# Altium PCB ALCT_MEZ_LX150T.PcbDoc (part 9 of 9)
Units mil, origin at the board's own origin, x right, y up, seen from the top; angles counter-clockwise.
Board outline 4101.98 x 5875.01 mil, 12 copper layers (Top Layer, Mid-Layer 1, +3V3, Mid-Layer 2, +1V2, Mid-Layer 4, +2V5, Mid-Layer 5, GND1, Mid-Layer 7, GND2, Bottom Layer), stack 64.7 mil thick; 378 components, 616 nets, 2492 pads, 1686 vias.
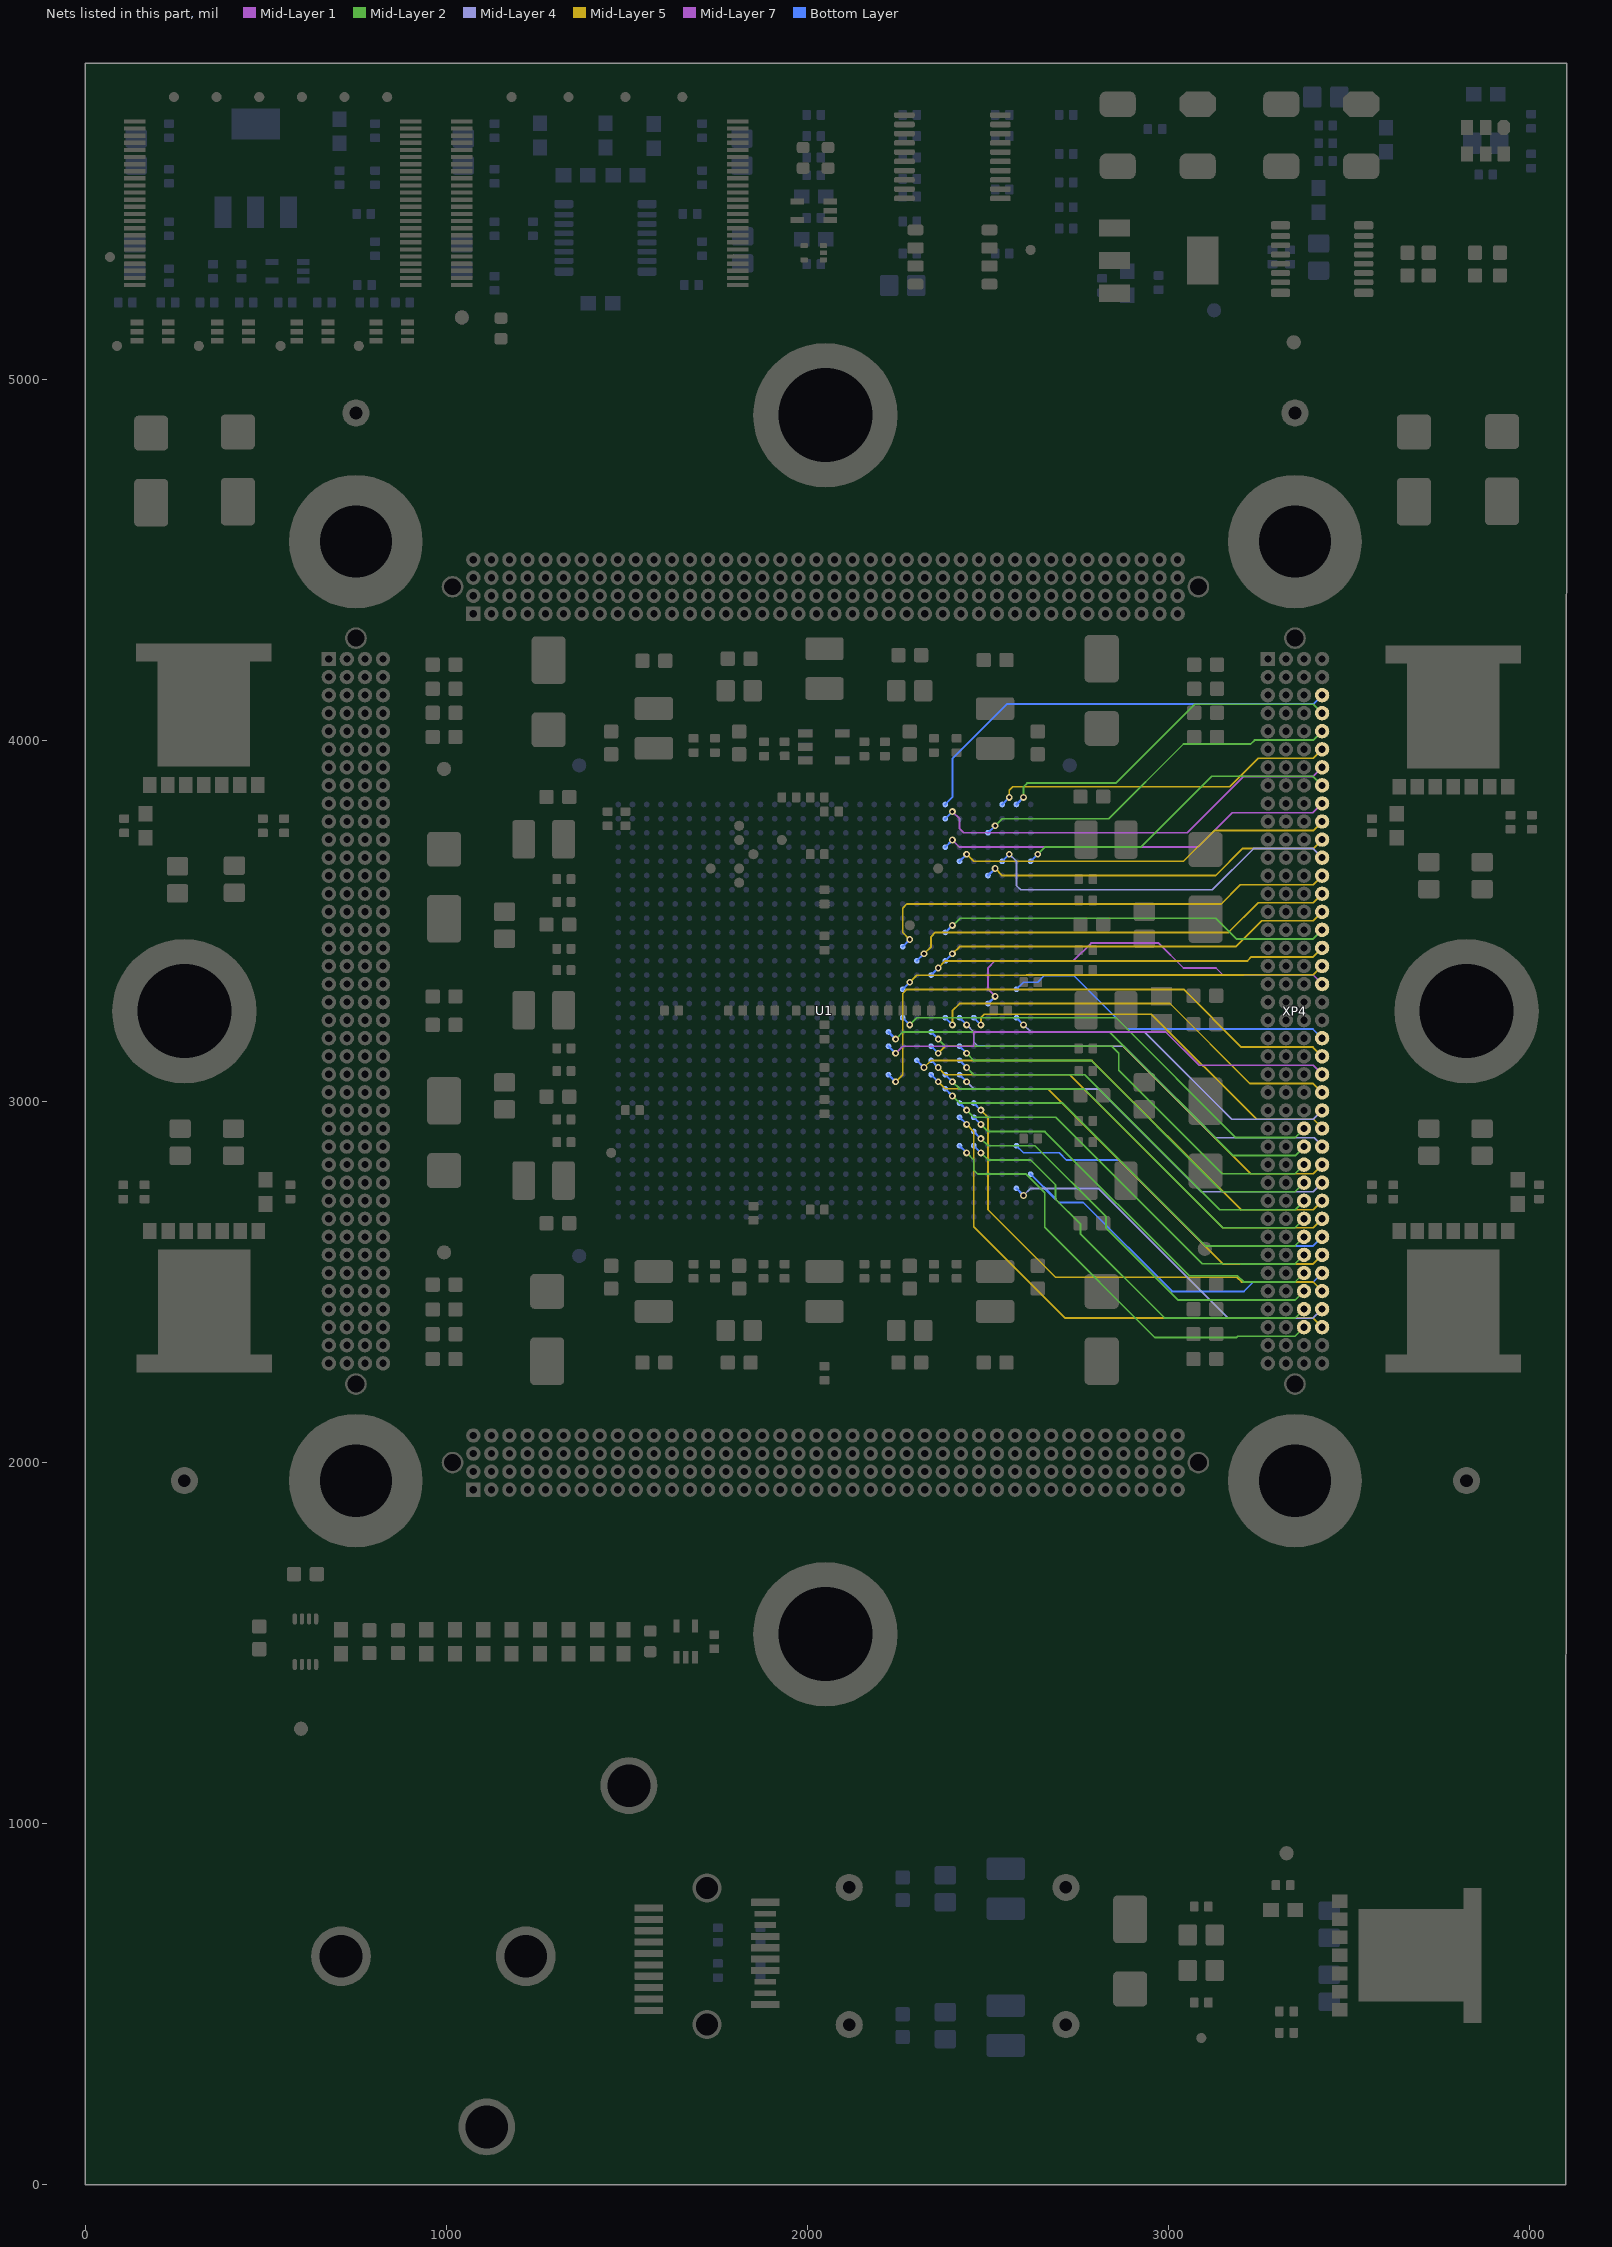
[diagram p18: the nets of this part, all layers, seen from the top]

## Via types
v1: diameter 19, hole 10, Top Layer to Bottom Layer, tented both sides, 1667 vias
v2: diameter 40, hole 20, Top Layer to Bottom Layer, 12 vias
v3: diameter 19, hole 10, Top Layer to Bottom Layer, 7 vias

## Nets (pads, with @x,y where several pads share a name; then routed paths per layer and width w, separated by ;. In a path a pad name is that pad's centre, name@x,y a point inside that pad or via, vN(x,y) a via of type N, cw(c..) or ccw(c..) an arc to the next point about the centre after c; other vN are vias at no path point) (continued)
XP4C_27: U1.K15 XP4.C27 | length 1275.1
  Mid-Layer 2 w5: v1(2283.48,3212) 2303,3231.52 2854.51,3231.52 3186.02,2900.01 3350,2900.01 XP4.C27@3375,2925.01
  Bottom Layer w6: U1.K15@2263.78,3231.7 v1(2283.48,3212)
XP4C_28: U1.L14 XP4.C28 | length 1323.9
  Mid-Layer 2 w5: v1@2244.09,3176.58 v1(2244.09,3172.63) 2263.61,3192.15 2353.97,3192.15 2354.08,3192.26 2370.34,3192.26 2370.45,3192.15 2836.99,3192.15 2836.99,3191.94 2875.78,3153.14 2876,3153.14 2895.87,3133.27 2895.87,3133.06 3023.42,3005.51 3023.63,3005.51 3179.13,2850.01 3351.18,2850.01 3375,2873.83 XP4.C28@3375,2875.01
  Bottom Layer w6: U1.L14@2224.41,3192.32 v1(2244.09,3172.63)
XP4C_29: U1.H14 XP4.C29 | length 1233
  Mid-Layer 2 w5: v1(2362.21,3172.63) 2382.06,3152.78 2842.71,3152.78 2862.22,3133.27 2862.22,3086.01 3148.23,2800.01 3350,2800.01 XP4.C29@3375,2825.01
  Bottom Layer w6: U1.H14@2342.53,3192.32 v1(2362.21,3172.63)
XP4C_30: U1.F13 XP4.C30 | length 1131
  Mid-Layer 2 w5: v1(2440.94,3133.27) 2460.8,3113.41 2785.61,3113.41 3149.02,2750.01 3350,2750.01 XP4.C30@3375,2775.01
  Bottom Layer w6: U1.F13@2421.26,3152.96 v1(2440.94,3133.27)
XP4C_31: U1.F12 XP4.C31 | length 1136.1
  Mid-Layer 2 w5: v1(2440.94,3093.9) 2460.8,3074.04 2767.88,3074.04 3141.91,2700.01 3351.18,2700.01 3375,2723.83 XP4.C31@3375,2725.01
  Bottom Layer w6: U1.F12@2421.26,3113.59 v1(2440.94,3093.9)
XP4C_32: U1.G11 XP4.C32 | length 1179.2
  Mid-Layer 2 w5: v1(2401.58,3054.53) 2421.44,3034.67 2765.75,3034.67 3150.41,2650.01 3350,2650.01 XP4.C32@3375,2675.01
  Bottom Layer w6: U1.G11@2381.89,3074.22 v1(2401.58,3054.53)
XP4C_33: U1.G10 XP4.C33 | length 1183.7
  Mid-Layer 2 w5: v1(2401.58,3015.15) 2421.43,2995.3 2432.7,2995.3 2432.81,2995.41 2449.08,2995.41 2449.19,2995.3 2706.87,2995.3 3102.16,2600.01 3350,2600.01 XP4.C33@3375,2625.01
  Bottom Layer w6: U1.G10@2381.89,3034.85 v1(2401.58,3015.15)
XP4C_34: U1.F9 XP4.C34 | length 1148.6
  Mid-Layer 2 w5: v1(2440.94,2975.78) 2460.8,2955.92 2687.19,2955.92 3092.79,2550.32 3200,2550.32 3200.32,2550.01 3350,2550.01 XP4.C34@3375,2575.01
  Bottom Layer w6: U1.F9@2421.26,2995.48 v1(2440.94,2975.78)
XP4C_35: U1.E8 XP4.C35 | length 1113.6
  Mid-Layer 2 w5: v1(2480.33,2936.42) 2500.18,2916.56 2657.66,2916.56 3057.09,2517.13 3190.92,2517.13 3207.72,2500.32 3225,2500.32 3225.32,2500.01 3350,2500.01 XP4.C35@3375,2525.01
  Bottom Layer w6: U1.E8@2460.63,2956.11 v1(2480.33,2936.42)
XP4C_36: U1.E7 XP4.C36 | length 1136.5
  Mid-Layer 2 w5: v1(2480.33,2897.05) 2500.19,2877.19 2630.08,2877.19 2826.94,2680.33 2826.94,2648.85 3025.47,2450.32 3200,2450.32 3200.32,2450.01 3350,2450.01 XP4.C36@3375,2475.01
  Bottom Layer w6: U1.E7@2460.63,2916.74 v1(2480.33,2897.05)
XP4C_37: U1.E6 XP4.C37 | length 1161.7
  Mid-Layer 2 w5: v1(2480.33,2857.68) 2500.19,2837.82 2618.29,2837.82 2687.01,2769.1 2687.01,2729.73 2755.91,2660.83 2755.91,2633.26 2988.84,2400.32 3200,2400.32 3200.32,2400.01 3350,2400.01 XP4.C37@3375,2425.01
  Bottom Layer w6: U1.E6@2460.63,2877.37 v1(2480.33,2857.68)
XP4C_38: U1.F6 XP4.C38 | length 1258.5
  Mid-Layer 2 w5: v1(2440.94,2857.68) 2460.83,2837.8 2460.83,2810.22 2472.26,2798.79 2606.15,2798.79 2657.3,2747.65 2657.3,2651.17 2962.41,2346.06 3187.21,2346.06 3191.16,2350.01 3350,2350.01 XP4.C38@3375,2375.01
  Bottom Layer w6: U1.F6@2421.26,2877.37 v1(2440.94,2857.68)
XP4D_3: U1.G30 XP4.D3 | length 1231.2
  Bottom Layer w5: U1.G30@2381.89,3822.25 2401.57,3841.93 2401.57,3948.25 2553.83,4100.51 3208.66,4100.51 3209.16,4100.01 3400,4100.01 XP4.D3@3425,4125.01
XP4D_4: U1.B30 XP4.D4 | length 988.5
  Mid-Layer 2 w5: v1(2598.43,3841.93) 2598.43,3871.46 2608.27,3881.3 2854.33,3881.3 3072.53,4099.51 3400.5,4099.51 XP4.D4@3425,4075.01
  Bottom Layer w6: U1.B30@2578.74,3822.25 v1(2598.43,3841.93)
XP4D_5: U1.D28 XP4.D5 | length 1041.6
  Mid-Layer 2 w5: v1(2519.68,3763.19) 2539.37,3782.88 2834.65,3782.88 3041.34,3989.57 3227.26,3989.57 3238.19,4000.51 3400.5,4000.51 XP4.D5@3425,4025.01
  Bottom Layer w6: U1.D28@2500,3743.51 v1(2519.68,3763.19)
XP4D_6: U1.C30 XP4.D6 | length 960.4
  Mid-Layer 5 w5: v1(2559.06,3841.93) 2559.06,3861.62 2568.9,3871.46 3169.29,3871.46 3248.03,3950.2 3400.2,3950.2 XP4.D6@3425,3975.01
  Bottom Layer w6: U1.C30@2539.37,3822.25 v1(2559.06,3841.93)
XP4D_7: U1.G29 XP4.D7 | length 1171.6
  Mid-Layer 7 w5: v1(2401.57,3802.56) 2421.44,3782.7 2421.44,3755.12 2432.86,3743.69 3051.36,3743.69 3207.68,3900.01 3400,3900.01 XP4.D7@3425,3925.01
  Bottom Layer w6: U1.G29@2381.89,3782.88 v1@2404.91,3805.88
XP4D_8: U1.A26 XP4.D8 | length 918.8
  Mid-Layer 2 w5: v1(2637.8,3684.45) 2657.48,3704.14 2923.23,3704.14 3119.59,3900.51 3399.5,3900.51 XP4.D8@3425,3875.01 XP4.D8@3425,3871.27
  Bottom Layer w6: U1.A26@2618.11,3664.77 v1(2637.8,3684.45)
XP4D_9: U1.G27 XP4.D9 | length 1109.3
  Mid-Layer 7 w5: v1(2401.58,3723.82) 2421.08,3704.32 3080.89,3704.32 3176.07,3799.51 3399.5,3799.51 XP4.D9@3425,3825.01
  Bottom Layer w6: U1.G27@2381.89,3704.14 v1(2401.58,3723.82)
XP4D_10: U1.F26 XP4.D10 | length 1065.7
  Mid-Layer 5 w5: v1(2440.94,3684.45) 2460.63,3664.77 3041.34,3664.77 3126.58,3750.01 3400,3750.01 XP4.D10@3425,3775.01
  Bottom Layer w6: U1.F26@2421.26,3664.77 v1(2440.94,3684.45)
XP4D_11: U1.D25 XP4.D11 | length 982.6
  Mid-Layer 5 w5: v1(2519.69,3645.07) 2539.36,3625.4 3129.92,3625.4 3204.53,3700.01 3400,3700.01 XP4.D11@3425,3725.01
  Bottom Layer w6: U1.D25@2500,3625.4 v1(2519.69,3645.07)
XP4D_12: U1.C26 XP4.D12 | length 1031.5
  Mid-Layer 4 w5: v1(2559.06,3684.45) 2578.93,3664.58 2578.93,3653.16 2578.93,3597.63 2590.35,3586.2 3121.43,3586.2 3235.24,3700.01 3400,3700.01 XP4.D12@3425,3675.01 XP4.D12@3425.2,3674.81
  Bottom Layer w6: U1.C26@2539.38,3664.77 v1(2559.06,3684.45)
XP4D_13: U1.K20 XP4.D13 | length 1321.2
  Mid-Layer 5 w5: v1(2283.47,3448.19) 2263.98,3467.68 2263.98,3535.05 2275.59,3546.66 2332.49,3546.66 2332.68,3546.47 2982.28,3546.47 2982.47,3546.66 3145.47,3546.66 3198.82,3600.01 3400,3600.01 XP4.D13@3425,3625.01
  Bottom Layer w6: U1.K20@2263.79,3428.52 v1(2283.47,3448.19)
XP4D_14: U1.J19 XP4.D14 | length 1215
  Mid-Layer 5 w5: v1(2322.84,3408.84) 2342.34,3428.34 2342.34,3455.9 2354.35,3467.92 3165.94,3467.92 3248.03,3550.01 3400,3550.01 XP4.D14@3425,3575.01
  Bottom Layer w6: U1.J19@2303.15,3389.18 v1(2322.84,3408.84)
XP4D_15: U1.G19 XP4.D15 | length 1099.4
  Mid-Layer 5 w5: v1(2401.57,3408.84) 2421.28,3428.55 3186.42,3428.55 3257.87,3500.01 3400,3500.01 XP4.D15@3425,3525.01
  Bottom Layer w6: U1.G19@2381.89,3389.18 v1(2401.57,3408.84)
XP4D_16: U1.G21 XP4.D16 | length 1093.4
  Mid-Layer 2 w5: v1(2401.58,3487.6) 2404.11,3487.6 2423.62,3507.11 3130.1,3507.11 3187.2,3450.01 3400,3450.01 XP4.D16@3425,3475.01
  Bottom Layer w6: U1.G21@2381.89,3467.92 v1(2401.58,3487.6)
XP4D_17: U1.H18 XP4.D17 | length 1113.6
  Mid-Layer 5 w5: v1(2362.21,3369.48) 2381.91,3389.18 3218.5,3389.18 3229.33,3400.01 3400,3400.01 XP4.D17@3425,3425.01
  Bottom Layer w6: U1.H18@2342.52,3349.81 v1(2362.21,3369.48)
XP4D_18: U1.K17 XP4.D18 | length 1188
  Mid-Layer 5 w5: v1(2283.48,3330.12) 2302.98,3349.62 2606.14,3349.62 2606.33,3349.81 2873.83,3349.81 2874.02,3349.99 3208.15,3349.99 3208.66,3350.51 3400.5,3350.51 XP4.D18@3425,3375.01
  Bottom Layer w6: U1.K17@2263.78,3310.44 v1(2283.48,3330.12)
XP4D_19: U1.D16 XP4.D19 | length 1115.1
  Mid-Layer 7 w5: v1(2519.69,3290.75) 2500.19,3310.25 2500.19,3369.69 2519.5,3388.99 2736.22,3388.99 2785.62,3438.39 2972.44,3438.39 3041.34,3369.49 3131.29,3369.49 3150.78,3350.01 3400,3350.01 XP4.D19@3425,3325.01
  Bottom Layer w6: U1.D16@2500,3271.07 v1(2519.69,3290.75)
XP4D_22: U1.B17 XP4.D22 | length 934
  Bottom Layer w5: U1.B17@2578.74,3310.44 2598.43,3330.12 2637.8,3330.12 2656.3,3348.62 2737.41,3348.62 2885.52,3200.51 3399.5,3200.51 XP4.D22@3425,3175.01
XP4D_23: U1.L11 XP4.D23 | length 1522.9
  Mid-Layer 5 w5: v1(2244.09,3054.53) 2263.98,3074.42 2263.98,3298.83 2275.4,3310.25 2550.98,3310.25 3041.51,3310.25 3201.25,3150.51 3399.5,3150.51 XP4.D23@3425,3125.01
  Bottom Layer w6: U1.L11@2224.41,3074.22 v1(2244.09,3054.53)
XP4D_24: U1.L13 XP4.D24 | length 1305.1
  Mid-Layer 1 w5: v1(2244.09,3133.27) 2263.83,3153 2421.26,3153 2421.3,3152.96 2460.63,3152.96 2460.63,3192.33 2460.83,3192.13 2499.8,3192.13 2500,3192.33 2992.13,3192.33 3084.45,3100.01 3400,3100.01 XP4.D24@3425,3075.01
  Bottom Layer w6: U1.L13@2224.41,3152.96 v1(2244.09,3133.27)
XP4D_25: U1.G15 XP4.D25 | length 1200.8
  Mid-Layer 5 w5: v1(2401.57,3212) 2401.57,3251.38 2421.26,3271.07 3003.92,3271.07 3225.48,3049.51 3400.7,3049.51 3425,3025.2 XP4.D25@3425,3025.01
  Bottom Layer w6: U1.G15@2381.89,3231.7 v1@2401.56,3212.01
XP4D_26: U1.B15 XP4.D26 | length 971.9
  Mid-Layer 4 w5: v1(2598.43,3212.01) 2617.93,3192.51 2932.89,3192.51 3174.89,2950.51 3400.5,2950.51 XP4.D26@3425,2975.01
  Bottom Layer w6: U1.B15@2578.74,3231.7 v1@2597.74,3212.68
XP4D_27: U1.E15 XP4.D27 | length 1128.4
  Mid-Layer 5 w5: v1(2480.33,3212) 2480.33,3231.71 2490.16,3241.54 2952.58,3241.54 3243.61,2950.51 3401.27,2950.51 3425,2926.78 XP4.D27@3425,2925.01
  Bottom Layer w6: U1.E15@2460.63,3231.7 v1(2480.33,3212)
XP4D_28: U1.F15 XP4.D28 | length 1169.1
  Mid-Layer 4 w5: v1(2440.94,3212) 2460.62,3192.33 2460.62,3182.5 2460.83,3182.29 2460.83,3164.56 2472.25,3153.13 2489.98,3153.13 2490.16,3152.96 2875.97,3152.96 3129.42,2899.51 3403.06,2899.51 3425,2877.56 XP4.D28@3425,2875.01
  Bottom Layer w6: U1.F15@2421.26,3231.7 v1(2440.94,3212)
XP4D_29: U1.H13 XP4.D29 | length 1255.2
  Mid-Layer 5 w5: v1(2362.21,3133.27) 2381.73,3152.78 2874.19,3152.78 3226.97,2800.01 3400,2800.01 XP4.D29@3425,2825.01
  Bottom Layer w6: U1.H13@2342.52,3152.96 v1(2362.21,3133.27)
XP4D_30: U1.F11 XP4.D30 | length 1148.3
  Mid-Layer 4 w5: v1(2440.94,3054.53) 2460.81,3034.66 2805.3,3034.66 3089.87,2750.1 3400.09,2750.1 XP4.D30@3425,2775.01
  Bottom Layer w6: U1.F11@2421.26,3074.22 v1(2440.94,3054.53)
XP4D_31: U1.J12 XP4.D31 | length 1319.7
  Mid-Layer 5 w5: v1(2322.84,3093.9) 2342.35,3113.4 2787.57,3113.4 3200.97,2700.01 3400,2700.01 XP4.D31@3425,2725.01
  Bottom Layer w6: U1.J12@2303.15,3113.59 v1(2322.84,3093.9)
XP4D_32: U1.H12 XP4.D32 | length 1284.9
  Mid-Layer 5 w5: v1(2362.21,3093.9) 2382.08,3074.03 2726.56,3074.03 3150.59,2650.01 3400,2650.01 XP4.D32@3425,2675.01
  Bottom Layer w6: U1.H12@2342.52,3113.59 v1(2362.21,3093.9)
XP4D_33: U1.B6 XP4.D33 | length 971.5
  Bottom Layer w5: U1.B6@2578.74,2877.37 2598.43,2857.68 2696.85,2857.68 2716.72,2837.81 2862.41,2837.81 3100.21,2600.01 3400,2600.01 XP4.D33@3425,2625.01
XP4D_34: U1.H11 XP4.D34 | length 1310
  Mid-Layer 5 w5: v1(2362.21,3054.53) 2381.71,3035.03 2665.19,3035.03 3150.21,2550.01 3400,2550.01 XP4.D34@3425,2575.01
  Bottom Layer w6: U1.H11@2342.52,3074.22 v1(2362.21,3054.53)
XP4D_35: U1.A4 XP4.D35 | length 962.5
  Bottom Layer w5: 2687.01,2729.73 2696.67,2720.07 2763.61,2720.07 3009.68,2474.01 3208.85,2474.01 3234.84,2500.01 3400,2500.01 XP4.D35@3425,2525.01
  Bottom Layer w6: U1.A4@2618.11,2798.63 2687.01,2729.73
XP4D_36: U1.E9 XP4.D36 | length 1330.7
  Mid-Layer 5 w5: v1(2480.33,2975.78) 2500,2956.11 2500,2700.2 2687.01,2513.19 3188.98,2513.19 3202.17,2500.01 3400,2500.01 XP4.D36@3425,2475.01 ; XP4.D36@3424.41,2474.41 XP4.D36@3425,2473.82
  Bottom Layer w6: U1.E9@2460.63,2995.48 v1(2480.33,2975.78)
XP4D_37: U1.B3 XP4.D37 | length 1022
  Mid-Layer 4 w5: v1(2598.43,2739.57) 2617.93,2759.07 2805.3,2759.07 3164.87,2399.51 3399.5,2399.51 XP4.D37@3425,2425.01
  Bottom Layer w6: U1.B3@2578.74,2759.26 v1(2598.43,2739.57)
XP4D_38: U1.F8 XP4.D38 | length 1399
  Mid-Layer 5 w5: v1(2440.94,2936.42) 2460.83,2916.53 2460.83,2668.92 2460.82,2652.76 2713.57,2400.01 3400,2400.01 XP4.D38@3425,2375.01
  Bottom Layer w6: U1.F8@2421.26,2956.11 v1(2440.94,2936.42)
pads on no net: J1.2 J1.8 J1.21 PCBM1.1 PCBM1.2 U1.A19 U1.A21 U1.A23 U1.AG14 U1.AG18 U1.AH14 U1.AH18 U1.AJ9 U1.AJ11 U1.AJ13 U1.AJ19 U1.AJ21 U1.AJ23 U1.AK9 U1.AK11 U1.AK13 U1.AK19 U1.AK21 U1.AK23 U1.B19 U1.B21 U1.B23 U1.C18 U1.D18 U1.U11 U2.1 U2.3 U2.9 U2.14 U2.16 U2.18 U2.35 U2.37 U2.39 U2.40 U2.41 U2.42 U3.1 U3.3 U3.9 U3.10 U3.14 U3.16 U3.18 U3.35 U3.37 U3.39 U3.40 U3.41 U3.42 U4.11 U4.12 U4.13 U4.15 U6.1 U11.3 U16.1 U16.2 U16.3 U16.7 U16.8 U17.1 U18.3 U19.3 U40.1 U80.9 U80.10 U80.11 U80.12 U80.15 U80.16 U100.1 X1.2 XP1.MC1 XP1.MC2 XP2.A30 XP2.B6 XP2.B7 XP2.B8 XP2.C5 XP2.C6 XP2.C20 XP2.C21 XP2.C32 XP2.C33 XP2.D5 XP2.D6 XP2.D20 XP2.D30 XP2.D32 XP2.D33 XP2.D35 XP2.MC1 XP2.MC2 XP3.MC1 XP3.MC2 XP4.A10 XP4.MC1 XP4.MC2 ZI1.1 ZI2.1 ZI3.1 ZI4.1 ZI5.1 ZI6.1 ZI7.1 ZI8.1 ZI9.1 ZI10.1 ZI11.1 ZI12.1
copper on no net: | length 2992.1
  +1V2 w7.87: 5049.21,4757.29 5649.61,4757.29
  +3V3 w7.87: 5049.21,4954.14 5649.61,4954.14
  +2V5 w7.87: 5049.21,4560.44 5649.61,4560.44
  GND1 w7.87: 5049.21,4353.75 5649.61,4353.75
  GND2 w7.87: 5049.21,4156.9 5639.76,4156.9
  other v1: 3966.54,5697.25

## Polygon pours and split planes (outlines as drawn)
+1V8 on Mid-Layer 2 "+1V8_L04_P072" (solid, remove dead copper, pour order 72): 0,5121.46 0,5873.82 4100,5873.82 4100,5121.46
+1V8 on Mid-Layer 2 "+1V8_L04_P170" (solid, pour order 170): 0,3664.77 59.05,3664.77 59.05,1253.35 718.5,1253.35 718.5,1194.3 698.82,1174.61 0,1174.61
GND on Mid-Layer 2 "GND_L04_P156" (solid, remove dead copper, pour order 156): 68.9,1263.77 68.9,3635.24 639.41,3635.24 639.41,2237.25 836.26,2237.25 1033.12,2237.25 1033.12,1882.92 3040.99,1882.92 3040.98,2128.99 3454.72,2128.99 3454.72,4402.61 3050.83,4402.61 3050.83,4530.91 600.39,4530.91 600.39,5150.99 4099.76,5150.99 4098.01,0 3444.53,0.01 3444.53,1263.77
+1V8 on Mid-Layer 2 "+1V8_L04_P164" (solid, remove dead copper, pour order 164): 0,3654.93 639.76,3654.93 639.76,4412.8 590.55,4462.01 590.55,4639.18 698.82,4747.45 1712.6,4747.45 1860.24,4895.08 1860.24,5141.15 0,5141.15
+2V5_SFP on Mid-Layer 2 "+2V5_SFP_L04_P166" (solid, pour order 166): 2649.27,943.5 2649.27,303.56 3200.27,303.56 3229.97,333.27 3229.98,500.59 3297.24,567.86 3297.24,590.8 3229.98,658.08 3229.98,904.13 3190.61,943.5 2944.55,943.5
+VCORE on Mid-Layer 2 "+VCORE_L04_P037" (solid, pour order 37): 3001.97,3673.03 3001.97,3750.65 3001.97,3773.04 3100.39,3861.62 3769.69,3861.62 3769.68,3677.96
sfp_vcct on Mid-Layer 2 "SFP_VCCT_L04_P077" (solid, remove dead copper, pour order 77): 1785.05,668.27 1785.05,644.65 2627.97,644.65 2627.97,927.33 1853.95,927.33 1853.95,700.95 1853.95,668.27
sfp_vcct2 on Mid-Layer 2 "SFP_VCCT2_L04_P078" (solid, remove dead copper, pour order 78): 1785.05,636.78 2627.97,636.78 2627.97,336.78 1853.95,336.78 1853.95,582.84 1853.95,613.16 1785.05,613.16
GND on Mid-Layer 1 "GND_L02_P178" (solid, remove dead copper, pour order 178): 0,4412.8 910.43,4412.8 910.43,4540.75 4100,4540.75 4100,5875.01 2874.02,5875.01 0,5875.01
+VCORE on Mid-Layer 1 "+VCORE_L02_P124" (solid, remove dead copper, pour order 124): -0.01,0.01 -0.01,4402.96 1143.03,4402.96 1141.73,4254.55 1358.16,4038.67 1232.05,3912.57 1091.76,4058.47 649.6,4058.47 649.6,3310.44 974.41,3310.44 974.41,3093.92 649.6,3093.89 649.6,2454.14 984.25,2454.14 1112.21,2582.09 1250,2582.09 1250,2424.61 1161.42,2336.03 1161.42,1893.12 1988.19,1893.12 1988.19,2060.44 2106.3,2060.44 2106.3,1893.12 2942.91,1893.12 2942.91,2246.68 3149.6,2246.68 3149.61,2365.56 3454.72,2365.56 3454.72,3162.8 3100.39,3162.8 3041.34,3221.86 3041.34,3251.38 3188.98,3251.38 3248.03,3310.44 3316.93,3310.44 3326.77,3320.28 3454.72,3320.28 3454.72,4127.37 2942.91,4127.36 2942.91,4530.91 2106.3,4530.91 2106.3,4363.59 1942.52,4363.59 1942.52,4708.08 2175.2,4708.08 2310.87,4983.67 4099.99,4983.67 4099.99,0.01
GND on Top Layer "GND_L01_P172" (solid, remove dead copper, pour order 172): -0.35,0 4099.65,0 4099.65,5875.01 -0.35,5875.01
+3V3 on Top Layer "+3V3_L01_P138" (solid, remove dead copper, pour order 138): 3238.19,637.76 3375.98,637.76 3405.51,667.29 3503.94,667.29 3503.94,746.03 3415.35,746.03 3385.83,716.5 3238.19,716.5
+2V5_SFP on Top Layer "+2V5_SFP_L01_P136" (solid, remove dead copper, pour order 136): 3503.94,588.55 3503.94,509.81 3316.93,509.81 3297.24,529.49 3238.19,529.49 3238.19,625.2 3378.7,625.2 3415.35,588.55
+1V2_MGT on Top Layer "+1V2_MGT_L01_P042" (solid, remove dead copper, pour order 42): 3818.9,3832.09 3818.9,3715.16 3907.48,3715.16 3907.48,3832.09
+1V2 on Top Layer "+1V2_L01_P083" (solid, remove dead copper, pour order 83): 298.08,2681.7 298.08,2798.63 208.71,2798.63 208.71,2681.7
+2V5_AUX on Top Layer "+2V5_AUX_L01_P162" (solid, remove dead copper, pour order 162): 3756.89,2681.7 3756.89,2798.63 3667.52,2798.63 3667.52,2681.7
GND on Mid-Layer 4 "GND_L06_P116" (solid, remove dead copper, pour order 116): 0,0.01 0,5875.01 836.61,5875 836.61,4806.5 1043.31,4599.81 1043.31,4255.32 846.46,4255.32 649.61,4255.32 649.61,2247.45 846.46,2247.45 1043.31,2247.45 1043.31,1893.12 3051.18,1893.12 3051.18,2139.18 3454.72,2139.18 3454.72,4412.8 3061.02,4412.8 3061.02,4525.99 1225,4525.99 1225,5873.82 4095.67,5873.82 4100,5869.49 4094.49,5863.98 4094.49,0.01
+VCORE on Mid-Layer 4 "+VCORE_L06_P152" (solid, remove dead copper, pour order 152): 3198.82,4275.01 3110.24,4186.42 3110.24,3960.04 2992.13,3841.93 2992.13,3654.93 3001.97,3645.08 3149.61,3645.08 3238.19,3733.67 3238.19,4275.01
+1V2_MGT on Mid-Layer 4 "+1V2_MGT_L06_P033" (solid, remove dead copper, pour order 33): 2677.17,3773.04 2677.17,3635.24 2755.91,3635.24 2755.91,3679.53 2790.36,3713.99 2844.49,3713.99 3090.55,3967.98 3090.55,4186.42 3228.35,4324.22 3385.83,4324.22 3454.72,4255.32 3454.72,3566.34 3789.37,3566.34 3917.32,3694.3 3917.32,3851.78 3809.06,3851.78 3809.05,3713.98 3789.37,3694.3 3572.83,3694.3 3553.15,3713.98 3553.15,4304.53 3454.72,4402.96 3139.76,4402.96 2972.44,4235.64 2972.44,3962.71 2828.63,3812.41 2716.54,3812.41
+VCORE on Mid-Layer 4 "+VCORE_L06_P150" (solid, remove dead copper, pour order 150): 2854.33,2690.36 2716.54,2552.56 2677.17,2513.19 2942.91,2247.45 3356.3,2247.45 3356.3,2355.71 3188.98,2355.71
+VCORE on Mid-Layer 4 "+VCORE_L06_P154" (solid, remove dead copper, pour order 154): 748.03,3192.33 885.83,3192.33 885.83,3241.54 1003.94,3241.54 1003.94,3271.07 935.04,3339.97 807.09,3339.97 807.09,3310.44 777.56,3310.44 748.03,3310.44
GND on Bottom Layer "GND_L12_P160" (solid, remove dead copper, pour order 160): 0,0 4100,0 4100,5875.01 0,5875.01
no net on Bottom Layer "NONET_L12_P146" (solid, remove dead copper, pour order 146): 49.21,637.76 472.44,637.76 472.44,1100.36 49.21,1100.36
GND on Mid-Layer 7 "GND_L10_P176" (solid, remove dead copper, pour order 176): 3631.89,4540.75 3631.89,2985.64 3543.31,2897.05 3543.31,1135.24 3503.94,1095.87 3503.94,412.41 3425.58,334.05 3426.25,0.01 4098.19,0.01 4098.19,3653.11 4100,4540.75
+1V2_MGT on Mid-Layer 7 "+1V2_MGT_L10_P087" (solid, remove dead copper, pour order 87): 1978.35,5603.75 1978.35,5812.39 899.27,5812.39 877.97,5791.09 877.97,5765.16 cw(c874.19,5765.11) 876.81,5762.37 857.13,5742.68 cw(c854.38,5745.36) 854.33,5741.53 814.96,5741.53 cw(c814.95,5745.49) 812.17,5742.68 800.36,5754.49 cw(c803.15,5757.29) 799.2,5757.29 799.2,5820.28 cw(c803.12,5820.28) 800.36,5823.08 831.85,5854.57 cw(c834.57,5851.86) 834.65,5855.73 2527.56,5855.73 cw(c2527.58,5851.93) 2530.35,5854.57 3958.63,5854.57 4084.65,5735.49 4084.65,3900.99 3877.95,3694.3 3828.74,3694.3 3809.06,3713.98 3809.06,3828.16 3985.73,3987.17 3985.73,5692.82 3889.5,5789.05 2501.61,5789.05 2501.62,5791.09 2472.43,5820.28 2037.4,5820.28 2037.4,5633.27 2057.09,5613.59 2155.51,5613.59 2165.35,5603.75 2165.35,5574.22 2155.51,5564.38 2037.4,5564.38 2017.72,5564.38
+3V3 on +3V3 "+3V3_L03_P128" (solid, remove dead copper, pour order 128): 0,1170.28 4100,1170.28 4100,5875.01 0,5875.01
GND on +3V3 "GND_L03_P168" (solid, pour order 168): 0,0.01 4100,0.01 4100,1219.49 0,1219.49
+2V5_AUX on +2V5 "+2V5_AUX_L07_P126" (solid, remove dead copper, pour order 126): 0,1223.82 4100,1223.82 4101.98,5875.01 0,5875.01
GND on +2V5 "+2V5-GND" (solid, pour order 174): 0.01,0.01 0,1209.65 4100,1209.65 4100,1189.97 4099.99,0
GND on Mid-Layer 5 "GND_L08_P120" (solid, remove dead copper, pour order 120): 0,0.01 0,4727.76 1043.31,4727.76 1043.31,4257.51 846.46,4257.51 649.61,4257.51 649.61,2247.44 1043.31,2247.45 1043.32,1893.12 3051.18,1893.12 3051.18,2247.45 3454.73,2247.45 3454.72,4257.51 3061.02,4257.51 3061.02,4530.91 2657.48,4530.91 2657.48,5875.01 4101.97,5875.01 4099.99,0
GND on GND1 "GND_L09_P130" (solid, remove dead copper, pour order 130): 0,0.01 4100,0.01 4100,5875.01 0,5875.01
GND on GND2 "GND_L11_P134" (solid, remove dead copper, pour order 134): 0,0.01 4100,0.01 4100,5875.01 0,5875.01
no net on Top Solder "NONET_L-01_P-001" (solid): 105.76,5254.93
no net on Top Solder "NONET_L-01_P-001" (solid): 105.76,5254.93
+1V2 on +1V2 "+1V2_L05_P081" (solid, remove dead copper, pour order 81): 0,0.01 4100,0.01 4100,5875.01 0,5875.01

## Keep-outs
Keep-Out Layer:
  lines w10: 0,0.01 0,5875.01 4100,5875.01 4100,0.01 0,0.01

## Other copper
Top Layer:
  rectangle net +2V5_SFP: 3415.35,514.97 3494.09,544.49
  rectangle net +2V5_SFP: 3435.04,574.02 3484.25,593.71
  rectangle net +3V3: 3442.91,672.45 3474.41,692.13
  region net +VCORE: 450.25,2798.63 361.66,2798.63 361.66,2680.52 450.25,2680.52
  rectangle net +VCORE: 3671.26,3713.98 3759.84,3832.09
  rectangle net +1V2_MGT: 2539.37,3192.33 2578.74,3221.86
  rectangle net +1V2_MGT: 2588.58,3231.7 2677.17,3271.07
  rectangle net +1.5V: 679.13,1592.72 1368.11,1622.25
  rectangle net +3V3: 206.69,3694.3 295.28,3832.09
  rectangle net +1V8: 364.17,3694.3 452.76,3830.12
  rectangle net +1V2_MGT: 2657.48,3005.32 2696.85,3782.88
  rectangle net NetD2_A: 1466.54,1592.72 1584.65,1622.25
  rectangle net GND: 1377.95,1592.72 1456.69,1622.25
  region net +3V3: 3909.06,2798.63 3820.47,2798.63 3820.47,2680.52 3909.06,2680.52
  pour cut-out: 1092.52,5615.9
  pour cut-out: 1053.15,5463.25 1067.91,5448.48 1067.91,5366.19 1120.1,5366.19 1178.35,5424.44 1178.35,5467.78 1173.23,5472.9 1166.28,5465.95 1052.1,5465.95 1052.1,5460.05
  pour cut-out: 2068.9,5471.29 2099.44,5440.75 2101.76,5443.06 2110.45,5443.06 2095.69,5457.82 2095.69,5492.89 2106.3,5503.5 2102.98,5506.82 2102.98,5558.21 2071.89,5558.21 2068.9,5555.22
  pour cut-out: 1948.82,5426.58 1948.82,5377.37 2076.77,5377.37 2076.77,5423.76 2078.74,5425.73 2077.89,5426.58
  pour cut-out: 1948.82,5558.21 1948.82,5426.58 2086.61,5426.58 2086.61,5557.3
  pour cut-out: 3336.61,5554.53 3336.61,5338 3385.83,5338 3425.2,5377.37 3425.2,5554.53
  pour cut-out: 1604.33,1386.03 1604.33,1573.04 1712.6,1573.04 1712.6,1543.51 1761.81,1543.51 1761.81,1454.93 1722.44,1454.93 1722.44,1445.08 1722.44,1386.03
  pour cut-out: 1397.64,267.72 2637.8,267.72 2637.8,928.35 1397.64,928.35
  pour cut-out: 2805.12,5800.6 2805.12,5549.27 3129.92,5549.27 3129.92,5800.6
  pour cut-out: 3257.87,5800.6 3257.87,5549.27 3582.68,5549.27 3582.68,5800.6
  pour cut-out: 1023.62,1883.27 1023.62,2217.51 635.63,2217.51 635.63,4282.51 1013.78,4282.51 1013.78,4540.75 3082.5,4540.75 3082.5,4282.51 3464.57,4282.51 3464.57,2217.5 3082.5,2217.5 3082.5,1883.27
  pour cut-out: 3791.88,5511.95 3791.88,5190.36 3964.02,5190.36 3961.96,5635.24 3945.43,5651.97 3792.67,5652.96 3790.7,5650.99
  pour cut-out: -12424.86,-11328.83 -12424.02,-11329.39 -12423.45,-11330.24 -12423.25,-11331.24 -12423.25,-11386.36 -12423.45,-11387.35 -12424.02,-11388.2 -12424.86,-11388.77 -12425.86,-11388.96 -12992.79,-11388.96 -12993.79,-11388.77 -12994.64,-11388.2 -12995.2,-11387.35 -12995.4,-11386.36 -12995.4,-11382.42 -12995.4,-11331.24 -12995.2,-11330.24 -12994.64,-11329.39 -12993.79,-11328.83 -12992.79,-11328.63 -12425.86,-11328.63
  pour cut-out: -10780.04,-8748.41 -10779.98,-8748.56 -10779.98,-10008.4 -10780.04,-10008.55 -10780.19,-10008.62 -12040.03,-10008.62 -12040.19,-10008.55 -12040.25,-10008.4 -12040.25,-8748.56 -12040.19,-8748.41 -12040.03,-8748.35 -10780.19,-8748.35
  pour cut-out: -12746.58,-8426.36 -12746.51,-8426.51 -12746.51,-8435.57 -12746.58,-8435.72 -12746.73,-8435.78 -12755,-8435.78 -12755.15,-8435.72 -12755.21,-8435.57 -12755.21,-8426.51 -12755.15,-8426.36 -12755,-8426.3 -12746.73,-8426.3
  pour cut-out: -12352.88,-8244.08 -12352.81,-8244.23 -12352.81,-8253.28 -12352.88,-8253.44 -12353.03,-8253.5 -12361.29,-8253.5 -12361.45,-8253.44 -12361.51,-8253.28 -12361.51,-8244.23 -12361.45,-8244.08 -12361.29,-8244.02 -12353.03,-8244.02
  pour cut-out: -12353.27,-10669.67 -12353.21,-10669.82 -12353.21,-10678.88 -12353.27,-10679.03 -12353.42,-10679.09 -12361.69,-10679.09 -12361.84,-10679.03 -12361.9,-10678.88 -12361.9,-10669.82 -12361.84,-10669.67 -12361.69,-10669.61 -12353.42,-10669.61
  pour cut-out: -10146.58,-8425.97 -10146.51,-8426.12 -10146.51,-8435.17 -10146.58,-8435.33 -10146.73,-8435.39 -10155,-8435.39 -10155.15,-8435.33 -10155.21,-8435.17 -10155.21,-8426.12 -10155.15,-8425.97 -10155,-8425.91 -10146.73,-8425.91
  pour cut-out: -9657.15,-7454.81 -9656.3,-7455.38 -9655.73,-7456.22 -9655.54,-7457.22 -9655.54,-7602.89 -9655.73,-7603.89 -9656.3,-7604.74 -9657.15,-7605.3 -9658.14,-7605.5 -9705.39,-7605.5 -9706.39,-7605.3 -9707.23,-7604.74 -9707.8,-7603.89 -9708,-7602.89 -9708,-7461.16 -9708,-7457.22 -9707.8,-7456.22 -9707.23,-7455.38 -9706.39,-7454.81 -9705.39,-7454.61 -9658.14,-7454.61
  pour cut-out: 915.35,5731.7 915.35,5239.57 1044.09,5239.57 1045.27,5240.75 1043.31,5242.72 1043.31,5731.7
  pour cut-out: 3271.65,397.64 3271.65,503.94 3381.89,503.94 3381.89,397.64
  pour cut-out: 551.18,1641.93 551.18,1386.03 1604.33,1386.03 1604.33,1641.93
  pour cut-out: 1909.45,689.38 1972.05,689.38 1972.05,783.86 1909.45,783.86
  pour cut-out: 1909.45,500.4 1972.05,500.4 1972.05,593.71 1909.45,593.71
  pour cut-out: 46.7,150.79 626.52,150.79 647.1,150.79 647.1,52.37 46.7,52.37
  text "1" at 4526.1,5134.22 h60
  text "TOP" at 4726.1,5134.22 h60
  text "COMPONENTS" at 5761.54,5134.22 h60
  text "1" at 66.39,80.87 h40
Mid-Layer 1:
  pour cut-out: 3238.19,5534.85 3238.19,5820.28 3612.2,5820.28 3612.2,5534.85
  pour cut-out: 1845.47,574.02 1845.47,514.97 1958.66,514.97 1958.66,574.02
  pour cut-out: 3799.21,5721.86 3799.21,5593.9 3951.77,5593.9 3951.77,5721.86
  pour cut-out: 3818.9,5451.19 3818.9,5338 3937.01,5338 3937.01,5451.19
  pour cut-out: 1850.39,770.87 1850.39,701.97 1958.66,701.97 1958.66,770.87
  pour cut-out: 46.7,150.79 647.1,150.79 647.1,52.37 46.7,52.37
  text "2" at 4526.1,5034.29 h60
  text "IN1" at 4726.1,5034.29 h60
  text "ROUTING & +VCORE" at 5761.54,5034.29 h60
  text "2" at 95.92,80.87 h40
Mid-Layer 2:
  rectangle net +2V5_SFP: 3257.87,544.49 3395.67,623.23
  rectangle net +1V8: 347.84,3694.3 452.76,3891.15
  pour cut-out: 1893.31,810.24 1893.31,672.45 2021.26,672.45 2021.26,810.24
  pour cut-out: 1893.31,682.29 1893.31,485.44 2021.26,485.44 2021.26,682.29
  pour cut-out: -12424.86,-11328.83 -12424.02,-11329.39 -12423.45,-11330.24 -12423.25,-11331.24 -12423.25,-11386.36 -12423.45,-11387.35 -12424.02,-11388.2 -12424.86,-11388.77 -12425.86,-11388.96 -12992.79,-11388.96 -12993.79,-11388.77 -12994.64,-11388.2 -12995.2,-11387.35 -12995.4,-11386.36 -12995.4,-11382.42 -12995.4,-11331.24 -12995.2,-11330.24 -12994.64,-11329.39 -12993.79,-11328.83 -12992.79,-11328.63 -12425.86,-11328.63
  pour cut-out: -10205.24,-8303.53 -10205.18,-8303.68 -10205.18,-10532.03 -10205.24,-10532.18 -10205.39,-10532.24 -12610.9,-10532.24 -12611.05,-10532.18 -12611.11,-10532.03 -12611.11,-8409.98 -12611.11,-8303.68 -12611.05,-8303.53 -12610.9,-8303.47 -10205.39,-8303.47
  pour cut-out: 46.7,150.79 647.1,150.79 647.1,52.37 46.7,52.37
  text "4" at 4526.1,4834.43 h60
  text "IN2" at 4726.1,4834.43 h60
  text "ROUTING & +1V8 PROM" at 5761.54,4834.43 h60
  text "4" at 194.34,81.9 h40
+1V2:
  pour cut-out: 2460.63,3192.33 2462.09,3192.33 2500,3192.33 2500,3154 2498.96,3154 2460.63,3154
  pour cut-out: 46.7,150.79 626.52,150.79 647.1,150.79 647.1,52.37 46.7,52.37
  text "5" at 4526.1,4734.5 h56.25
  text "PWR" at 4726.1,4734.5 h56.25
  text "+1V2 VCCINT" at 5761.54,4734.5 h56.25
  text "5" at 243.55,81.9 h40
Mid-Layer 4:
  pour cut-out: 46.7,150.79 626.52,150.79 647.1,150.79 647.1,52.37 46.7,52.37
  text "6" at 4533.98,4634.57 h60
  text "IN4" at 4733.98,4634.57 h60
  text "ROUTING" at 5769.41,4634.57 h60
  text "6" at 292.77,81.9 h40
Mid-Layer 5:
  pour cut-out: 46.7,150.79 626.52,150.79 647.1,150.79 647.1,52.37 46.7,52.37
  text "8" at 4526.1,4434.72 h60
  text "IN5" at 4726.1,4434.72 h60
  text "ROUTING" at 5761.54,4434.72 h60
  text "8" at 401.03,81.9 h40
+3V3:
  rectangle net +3V3: 3267.72,642.92 3395.67,721.66
  rectangle net +3V3: 3287.4,642.92 3395.67,1239.18
  pour cut-out: 46.7,150.79 647.1,150.79 647.1,52.37 46.7,52.37
  text "3" at 4526.1,4934.36 h56.25
  text "PWR" at 4726.1,4934.36 h56.25
  text "+3V3" at 5761.54,4934.36 h56.25
  text "3" at 145.92,80.87 h40
Mid-Layer 7:
  pour cut-out: 46.7,150.79 626.52,150.79 647.1,150.79 647.1,52.37 46.7,52.37
  text "10" at 4526.1,4234.86 h60
  text "IN7" at 4726.1,4234.86 h60
  text "ROUTING / MGT" at 5761.54,4234.86 h60
  text "A" at 499.46,81.9 h40
+2V5:
  pour cut-out: 46.7,150.79 626.52,150.79 647.1,150.79 647.1,52.37 46.7,52.37
  text "7" at 4530.04,4534.65 h56.25
  text "PWR" at 4730.04,4534.65 h56.25
  text "+2V5" at 5765.47,4534.65 h56.25
  text "7" at 351.82,81.9 h40
GND1:
  pour cut-out: 46.7,150.79 626.52,150.79 647.1,150.79 647.1,52.37 46.7,52.37
  text "9" at 4526.1,4334.79 h56.25
  text "GND" at 4726.1,4334.79 h56.25
  text "GND" at 5761.54,4334.79 h56.25
  text "9" at 450.25,81.9 h40
GND2:
  pour cut-out: 46.7,150.79 626.52,150.79 647.1,150.79 647.1,52.37 46.7,52.37
  text "11" at 4526.1,4134.93 h60
  text "GND" at 4726.1,4134.93 h60
  text "GND" at 5761.54,4134.93 h60
  text "B" at 548.67,81.9 h40
Bottom Layer:
  rectangle net GND: 3356.3,5593.9 3385.83,5712.01
  rectangle net +3V3: 3484.25,5593.9 3513.78,5712.01
  rectangle net GND: 388.19,5669.89 563.78,5682.88
  rectangle net GND: 470.87,5614.38 481.5,5747.05
  rectangle net GND: 1786.42,583.86 1835.63,603.55
  rectangle net GND: 1786.42,682.29 1835.63,701.97
  rectangle net sfp_vcct: 1786.42,647.84 1835.63,667.53
  rectangle net sfp_vcct2: 1786.42,613.39 1835.63,633.08
  rectangle net +2V5_SFP: 3267.72,544.49 3391.85,623.23
  rectangle net +3V3: 3267.72,642.92 3395.67,721.66
  pour cut-out: 46.7,150.79 626.52,150.79 647.1,150.79 647.1,52.37 46.7,52.37
  pour cut-out: 1013.96,1883.34 1013.96,2210.91 632.09,2210.91 632.09,4271.66 1013.96,4271.66 1013.96,4537.41 3077.17,4537.41 3077.17,4271.66 3451.18,4271.66 3451.18,2210.91 3077.16,2210.91 3077.16,1879.51
  pour cut-out: -12424.86,-11328.83 -12424.02,-11329.39 -12423.45,-11330.24 -12423.25,-11331.24 -12423.25,-11386.36 -12423.45,-11387.35 -12424.02,-11388.2 -12424.86,-11388.77 -12425.86,-11388.96 -12992.79,-11388.96 -12993.79,-11388.77 -12994.64,-11388.2 -12995.2,-11387.35 -12995.4,-11386.36 -12995.4,-11382.42 -12995.4,-11331.24 -12995.2,-11330.24 -12994.64,-11329.39 -12993.79,-11328.83 -12992.79,-11328.63 -12425.86,-11328.63
  pour cut-out: -10205.24,-8303.53 -10205.18,-8303.68 -10205.18,-10532.03 -10205.24,-10532.18 -10205.39,-10532.24 -12610.9,-10532.24 -12611.05,-10532.18 -12611.11,-10532.03 -12611.11,-8409.98 -12611.11,-8303.68 -12611.05,-8303.53 -12610.9,-8303.47 -10205.39,-8303.47
  pour cut-out: 46.7,150.79 626.52,150.79 647.1,150.79 647.1,52.37 46.7,52.37
  text "12" at 4526.1,4035.01 h60
  text "BOT" at 4726.1,4035.01 h60
  text "ROUTING / COMPONENTS" at 5761.54,4035.01 h60
  text "C" at 597.88,81.9 h40

## Silkscreen, mask and mechanical layers (free items; w line width, h text height)
Top Overlay:
  text "3V3" at 216.54,5816.34 h23.62
  text "CORE" at 318.9,5816.34 h23.62
  text "2V5" at 452.76,5816.34 h23.62
  text "1V8" at 570.87,5816.34 h23.62
  text "1V2" at 688.98,5816.34 h23.62
  text "1V2O" at 799.21,5816.34 h23.62
  text "/PROG" at 1118.11,5816.34 h23.62
  text "/CCLK" at 1279.53,5816.34 h23.62
  text "INITB" at 1444.88,5816.34 h23.62
  text "DONE" at 1610.24,5816.34 h23.62
  text "DONE" at 1998.03,5692.33 h23.62 r90
  text "INIT" at 2066.93,5692.33 h23.62 r90
  text "TMS" at 157.48,5052.56 h20
  text "TCK" at 383.86,5052.56 h20
  text "TDI" at 610.24,5052.56 h20
  text "TDO" at 816.93,5052.56 h20
  text "SILK TOP" at 4527.56,3494.16 h60
  text "UCLA S6 / 01/23/2019" at 3116.88,1408.44 h59.06
  text "LX150T / v2" at 3362.94,1408.44 h59.06
  text "2V5" at 3076.77,367.33 h23.62 r270
Bottom Overlay:
  lines w10: 10,1225.01 4090,1225.01 ; 26.97,5153.23 4066.97,5153.23 ; 550,2148.82 550,4348.82 950,4348.82 950,4623.82 3150,4623.82 3150,4348.82 3550,4348.82 3550,2148.82 3150,2148.82 3150,1798.82 950,1798.82 950,2148.82 550,2148.82
  text "SILK BOTTOM" at 4527.56,3384.8 h60
Top Paste:
  text "PASTE TOP" at 4527.56,3275.44 h60
Bottom Paste:
  text "PASTE BOTTOM" at 4527.56,3166.08 h60
Top Solder:
  text "MASK TOP" at 4527.56,3056.72 h60
Bottom Solder:
  text "MASK BOTTOM" at 4527.56,2947.36 h60
Assembly Top:
  text "ASSEMBLY TOP" at 4527.56,3822.25 h60
Assembly Bottom:
  text "ASSEMBLY BOTTOM" at 4527.56,3712.89 h60
Board Outline:
  lines w10: 4099.92,0.01 0,0.01 0,5875.01 4100,5875.01 4100,0.01
Drill Drawing:
  circle w10: c4617.91,2186.88 r33.33
  circle w10: c4617.91,1136.88 r20
  circle w10: c4617.91,1136.88 r33.33
  lines w10: 0,1018.79 0,1178.79 ; 4100,1018.79 4100,1178.79 ; 0,0.01 4100,0.01 4100,5875.01 0,5875.01 0,0.01 ; 4584.58,1320.22 4651.24,1320.22 4617.91,1253.55 4584.58,1320.22 ; 4584.58,1403.55 4651.24,1403.55 4651.24,1470.22 4584.58,1470.22 4584.58,1403.55 ; 4584.58,1570.22 4601.24,1570.22 4601.24,1553.55 4634.58,1553.55 4634.58,1570.22 4651.24,1570.22 4651.24,1603.55 4634.58,1603.55 4634.58,1620.22 4601.24,1620.22 4601.24,1603.55 4584.58,1603.55 4584.58,1570.22 ; 4584.58,1703.55 4617.91,1720.22 4651.24,1703.55 4634.58,1736.88 4651.24,1770.22 4617.91,1753.55 4584.58,1770.22 4601.24,1736.88 4584.58,1703.55 ; 4584.58,1853.55 4584.58,1870.22 4601.24,1886.88 4584.58,1903.55 4584.58,1920.22 4601.24,1920.22 4617.91,1903.55 4634.58,1920.22 4651.24,1920.22 4651.24,1903.55 4634.58,1886.88 4651.24,1870.22 4651.24,1853.55 4634.58,1853.55 4617.91,1870.22 4601.24,1853.55 4584.58,1853.55 ; 4584.58,2003.55 4651.24,2003.55 4651.24,2070.22 4584.58,2070.22 4584.58,2003.55 ; 4584.58,2320.22 4601.24,2320.22 4617.91,2303.55 4634.58,2320.22 4651.24,2320.22 4634.58,2336.88 4651.24,2353.55 4634.58,2353.55 4617.91,2370.22 4601.24,2353.55 4584.58,2353.55 4601.24,2336.88 4584.58,2320.22 ; 4597.91,2016.88 4637.91,2016.88 4637.91,2056.88 4597.91,2056.88 4597.91,2016.88
  lines w15: 4524.79,1058.55 8769.67,1058.55 ; 4524.79,2408.55 8769.67,2408.55 ; 5075.66,908.55 5075.66,2558.55 ; 5735.48,908.55 5735.48,2558.55 ; 6895.14,908.55 6895.14,2558.55 ; 7401.02,908.55 7401.02,2558.55 ; 8134.82,908.55 8134.82,2558.55 ; 4524.79,908.55 8769.67,908.55 8769.67,2558.55 4524.79,2558.55 4524.79,908.55
  text "UCLA Physics MC_S6 LX150T" at 4525.94,5542.37 h75
  text "01/23/2019" at 4525.94,5392.37 h56.25
  text "Rev 2" at 5175.94,5392.37 h56.25
  text "Layer Stack-up" at 4527.56,5274.02 h56.25
  text "DRILL DRAWING" at 4527.56,2838 h60
  text "Symbol" at 4614.79,2453.55 h72
  text "Count" at 5120.66,2453.55 h72
  text "Hole Size" at 5780.48,2453.55 h72
  text "Plated" at 6940.14,2453.55 h72
  text "Hole Type" at 7446.02,2453.55 h72
  text "Via/Pad" at 8179.82,2453.55 h72
  text "2" at 5120.66,2303.55 h60
  text "1.550mm (61.02mil)" at 5780.48,2303.55 h60
  text "PTH" at 6940.14,2303.55 h60
  text "Round" at 7446.02,2303.55 h60
  text "Pad" at 8179.82,2303.55 h60
  text "SFP Socket Posts" at 8877.95,2301.58 h60
  text "4" at 5120.66,2153.55 h60
  text "0.889mm (35.00mil)" at 5780.48,2153.55 h60
  text "PTH" at 6940.14,2153.55 h60
  text "Round" at 7446.02,2153.55 h60
  text "Pad" at 8179.82,2153.55 h60
  text "VTTX Screw Holes" at 8877.95,2149.64 h60
  text "Thru-Hole Inductor" at 8868.11,2007.54 h60
  text "4" at 5120.66,2003.55 h60
  text "0.889mm (35.00mil)" at 5780.48,2003.55 h60
  text "PTH" at 6940.14,2003.55 h60
  text "Round" at 7446.02,2003.55 h60
  text "Pad" at 8179.82,2003.55 h60
  text "TP GROUND" at 8868.11,1855.59 h60
  text "4" at 5120.66,1853.55 h60
  text "3.000mm (118.11mil)" at 5780.48,1853.55 h60
  text "PTH" at 6940.14,1853.55 h60
  text "Round" at 7446.02,1853.55 h60
  text "Pad" at 8179.82,1853.55 h60
  text "Stiffener Plate" at 8868.11,1723.33 h60
  text "4" at 5120.66,1703.55 h60
  text "5.080mm (200.00mil)" at 5780.48,1703.55 h60
  text "PTH" at 6940.14,1703.55 h60
  text "Round" at 7446.02,1703.55 h60
  text "Pad" at 8179.82,1703.55 h60
  text "Baseboard Mounts" at 8868.11,1571.39 h60
  text "4" at 5120.66,1553.55 h60
  text "6.604mm (260.00mil)" at 5780.48,1553.55 h60
  text "PTH" at 6940.14,1553.55 h60
  text "Round" at 7446.02,1553.55 h60
  text "Pad" at 8179.82,1553.55 h60
  text "Samtec Guide Posts" at 8868.11,1419.44 h60
  text "8" at 5120.66,1403.55 h60
  text "1.194mm (47.00mil)" at 5780.48,1403.55 h60
  text "PTH" at 6940.14,1403.55 h60
  text "Round" at 7446.02,1403.55 h60
  text "Pad" at 8179.82,1403.55 h60
  text "Samtec Pins" at 8868.11,1267.5 h60
  text "652" at 5120.66,1253.55 h60
  text "0.508mm (20.00mil)" at 5780.48,1253.55 h60
  text "PTH" at 6940.14,1253.55 h60
  text "Round" at 7446.02,1253.55 h60
  text "(Mixed)" at 8179.82,1253.55 h60
  text "Standard Via" at 8868.11,1115.56 h60
  text "1674" at 5120.66,1103.55 h60
  text "0.254mm (10.00mil)" at 5780.48,1103.55 h60
  text "PTH" at 6940.14,1103.55 h60
  text "Round" at 7446.02,1103.55 h60
  text "Via" at 8179.82,1103.55 h60
  text "2356 Total" at 5120.66,953.55 h60
  text "Board dimensions in mils" at 4527.56,761.23 h56.25

## Dimensions
900,4550.01 to 750,4275.01 on Board Outline
0,5875.01 to 0,0.01 on Drill Drawing
0,0.01 to 4100,0.01 on Drill Drawing

## Text inside footprints (layer, text, board x,y; h text height)
CT1: Top Overlay "+" at 187.01,4988.39 h37.5 r270; Assembly Top "+" at 167.32,4941.15 h16 r270
CT2: Top Overlay "+" at 427.17,4991.54 h37.5 r270; Assembly Top "+" at 407.48,4944.3 h16 r270
CT3: Top Overlay "+" at 990.16,2670.67 h37.5 r90; Assembly Top "+" at 1009.84,2717.92 h16 r90
CT4: Top Overlay "+" at 2811.02,3895.08 h37.5 r90; Assembly Top "+" at 2830.71,3942.33 h16 r90
CT5: Top Overlay "+" at 998.03,3836.03 h37.5 r270; Assembly Top "+" at 978.35,3788.79 h16 r270
CT6: Top Overlay "+" at 3098.43,2669.89 h37.5 r90; Assembly Top "+" at 3118.11,2717.13 h16 r90
CT7: Top Overlay "+" at 2889.76,404.73 h37.5 r90; Assembly Top "+" at 2909.45,451.97 h16 r90
CT8: Top Overlay "+" at 3683.07,4991.54 h37.5 r270; Assembly Top "+" at 3663.39,4944.3 h16 r270
CT9: Top Overlay "+" at 3927.17,4992.33 h37.5 r270; Assembly Top "+" at 3907.48,4945.08 h16 r270
CT10: Top Overlay "+" at 2818.9,2611.62 h37.5 r270; Assembly Top "+" at 2799.21,2564.38 h16 r270
CT11: Top Overlay "+" at 1279.53,3891.15 h37.5 r90; Assembly Top "+" at 1299.21,3938.39 h16 r90
CT12: Top Overlay "+" at 1283.46,2611.62 h37.5 r270; Assembly Top "+" at 1263.78,2564.38 h16 r270
CT13: Top Overlay "+" at 3106.3,3835.24 h37.5 r270; Assembly Top "+" at 3086.61,3788 h16 r270
D1: Assembly Top "K" at 1976.38,5700.2 h16 r270; Assembly Top "A" at 1976.38,5546.66 h16 r270
D2: Assembly Top "A" at 1576.77,1571.07 h16 r90; Assembly Top "K" at 1576.77,1417.53 h16 r90
D40: Assembly Top "A" at 1139.76,5074.22 h16 r270; Assembly Top "K" at 1139.76,5227.76 h16 r270
D41: Assembly Top "K" at 2045.28,5700.2 h16 r270; Assembly Top "A" at 2045.28,5546.66 h16 r270
U1: Top Overlay "1" at 2665.35,2672.64 h21.65 r180; Top Overlay "2" at 2670.7,2708.08 h21.65 r180; Top Overlay "3" at 2670.7,2747.45 h21.65 r180; Top Overlay "7" at 2670.7,2904.93 h21.65 r180; Top Overlay "6" at 2669.66,2865.56 h21.65 r180; Top Overlay "5" at 2670.7,2826.19 h21.65 r180; Top Overlay "4" at 2671.73,2786.82 h21.65 r180; Top Overlay "10" at 2686.57,3023.04 h21.65 r180; Top Overlay "11" at 2677.29,3062.41 h21.65 r180; Top Overlay "12" at 2686.57,3101.78 h21.65 r180; Top Overlay "13" at 2686.57,3141.15 h21.65 r180; Top Overlay "9" at 2669.66,2983.67 h21.65 r180; Top Overlay "8" at 2670.7,2944.3 h21.65 r180; Top Overlay "15" at 2686.57,3219.89 h21.65 r180; Top Overlay "16" at 2685.54,3302.56 h21.65 r180; Top Overlay "17" at 2686.57,3341.65 h21.65 r180; Top Overlay "14" at 2687.6,3180.52 h21.65 r180; Top Overlay "21" at 2680.7,3498.01 h21.65 r180; Top Overlay "22" at 2689.97,3537.1 h21.65 r180; Top Overlay "23" at 2689.97,3576.19 h21.65 r180; Top Overlay "24" at 2691,3615.27 h21.65 r180; Top Overlay "20" at 2689.97,3458.92 h21.65 r180; Top Overlay "19" at 2685.54,3419.83 h21.65 r180; Top Overlay "18" at 2686.57,3380.74 h21.65 r180; Top Overlay "25" at 2689.97,3654.36 h21.65 r180; Top Overlay "30" at 2689.97,3849.81 h21.65 r180; Top Overlay "29" at 2688.94,3810.72 h21.65 r180; Top Overlay "28" at 2689.97,3771.63 h21.65 r180; Top Overlay "27" at 2689.97,3732.54 h21.65 r180; Top Overlay "26" at 2688.94,3693.45 h21.65 r180; Top Overlay "AF" at 1602.36,2641.15 h21.65 r270; Top Overlay "AG" at 1562.99,2641.15 h21.65 r270; Top Overlay "AH" at 1523.62,2641.15 h21.65 r270; Top Overlay "AJ" at 1484.25,2641.15 h21.65 r270; Top Overlay "AK" at 1444.88,2641.15 h21.65 r270; Top Overlay "AE" at 1641.73,2641.15 h21.65 r270; Top Overlay "V" at 1917.32,2641.15 h21.65 r270; Top Overlay "W" at 1877.95,2641.15 h21.65 r270; Top Overlay "Y" at 1838.58,2641.15 h21.65 r270; Top Overlay "AD" at 1681.1,2641.15 h21.65 r270; Top Overlay "AC" at 1720.47,2641.15 h21.65 r270; Top Overlay "AB" at 1759.84,2641.15 h21.65 r270; Top Overlay "AA" at 1799.21,2641.15 h21.65 r270; Top Overlay "P" at 2114.17,2641.15 h21.65 r270; Top Overlay "U" at 1956.69,2641.15 h21.65 r270; Top Overlay "T" at 1996.06,2641.15 h21.65 r270; Top Overlay "R" at 2074.8,2641.15 h21.65 r270; Top Overlay "H" at 2350.39,2641.15 h21.65 r270; Top Overlay "J" at 2311.02,2641.15 h21.65 r270; Top Overlay "N" at 2153.54,2641.15 h21.65 r270; Top Overlay "M" at 2192.91,2641.15 h21.65 r270; Top Overlay "L" at 2232.28,2641.15 h21.65 r270; Top Overlay "K" at 2271.65,2641.15 h21.65 r270; Top Overlay "D" at 2507.87,2641.15 h21.65 r270; Top Overlay "E" at 2468.5,2641.15 h21.65 r270; Top Overlay "F" at 2429.13,2641.15 h21.65 r270; Top Overlay "G" at 2389.76,2641.15 h21.65 r270; Top Overlay "C" at 2547.24,2641.15 h21.65 r270; Top Overlay "B" at 2586.61,2641.15 h21.65 r270; Top Overlay "A" at 2625.98,2641.15 h21.65 r270; Top Overlay "A" at 2645.67,3861.62 h21.65 r90; Top Overlay "B" at 2606.58,3861.62 h21.65 r90; Top Overlay "C" at 2567.49,3861.62 h21.65 r90; Top Overlay "G" at 2411.14,3861.62 h21.65 r90; Top Overlay "F" at 2450.22,3861.62 h21.65 r90; Top Overlay "E" at 2489.31,3861.62 h21.65 r90; Top Overlay "D" at 2528.4,3861.62 h21.65 r90; Top Overlay "K" at 2293.87,3861.62 h21.65 r90; Top Overlay "L" at 2254.78,3861.62 h21.65 r90; Top Overlay "M" at 2215.69,3861.62 h21.65 r90; Top Overlay "N" at 2176.6,3861.62 h21.65 r90; Top Overlay "J" at 2332.96,3861.62 h21.65 r90; Top Overlay "H" at 2372.05,3861.62 h21.65 r90; Top Overlay "R" at 2098.43,3861.62 h21.65 r90; Top Overlay "T" at 2019.68,3861.62 h21.65 r90; Top Overlay "U" at 1980.03,3861.62 h21.65 r90; Top Overlay "P" at 2137.51,3861.62 h21.65 r90; Top Overlay "AA" at 1821.43,3861.62 h21.65 r90; Top Overlay "AB" at 1781.78,3861.62 h21.65 r90; Top Overlay "AC" at 1742.13,3861.62 h21.65 r90; Top Overlay "AD" at 1702.48,3861.62 h21.65 r90; Top Overlay "Y" at 1861.08,3861.62 h21.65 r90; Top Overlay "W" at 1900.73,3861.62 h21.65 r90; Top Overlay "V" at 1940.38,3861.62 h21.65 r90; Top Overlay "AE" at 1662.82,3861.62 h21.65 r90; Top Overlay "AK" at 1464.57,3861.62 h21.65 r90; Top Overlay "AJ" at 1504.22,3861.62 h21.65 r90; Top Overlay "AH" at 1543.87,3861.62 h21.65 r90; Top Overlay "AG" at 1583.52,3861.62 h21.65 r90; Top Overlay "AF" at 1623.17,3861.62 h21.65 r90; Top Overlay "26" at 1403.64,3672.64 h21.65; Top Overlay "27" at 1402.61,3712.01 h21.65; Top Overlay "2" at 1402.61,3751.38 h21.65; Top Overlay "2" at 1403.64,3790.75 h21.65; Top Overlay "30" at 1402.61,3830.12 h21.65; Top Overlay "25" at 1402.61,3633.27 h21.65; Top Overlay "18" at 1406.01,3357.68 h21.65; Top Overlay "19" at 1407.04,3397.05 h21.65; Top Overlay "20" at 1402.61,3436.42 h21.65; Top Overlay "24" at 1401.57,3593.9 h21.65; Top Overlay "23" at 1402.61,3554.53 h21.65; Top Overlay "22" at 1402.61,3515.16 h21.65; Top Overlay "21" at 1411.88,3475.79 h21.65; Top Overlay "14" at 1404.98,3160.83 h21.65; Top Overlay "17" at 1406.01,3318.31 h21.65; Top Overlay "16" at 1407.04,3278.94 h21.65; Top Overlay "15" at 1406.01,3200.2 h21.65; Top Overlay "8" at 1421.88,2924.61 h21.65; Top Overlay "9" at 1422.91,2963.98 h21.65; Top Overlay "13" at 1406.01,3121.46 h21.65; Top Overlay "12" at 1406.01,3082.09 h21.65; Top Overlay "11" at 1415.29,3042.72 h21.65; Top Overlay "10" at 1406.01,3003.35 h21.65; Top Overlay "4" at 1420.85,2767.13 h21.65; Top Overlay "5" at 1421.88,2806.5 h21.65; Top Overlay "6" at 1422.91,2845.87 h21.65; Top Overlay "7" at 1421.88,2885.24 h21.65; Top Overlay "3" at 1421.88,2727.76 h21.65; Top Overlay "2" at 1421.88,2688.39 h21.65; Top Overlay "1" at 1425.2,2649.02 h21.65
XP1: Bottom Overlay "A1" at 705.58,4305.52 h37.5; Bottom Overlay "D1" at 853.22,4305.52 h37.5; Top Overlay "D1" at 790.22,4305.52 h37.5; Top Overlay "A1" at 644.55,4305.52 h37.5; Assembly Bottom "A1" at 700.58,4320.52 h25; Assembly Bottom "D1" at 848.22,4320.52 h25
XP2: Bottom Overlay "D1" at 994.49,4528.22 h37.5 r90; Bottom Overlay "A1" at 994.49,4380.58 h37.5 r90; Top Overlay "A1" at 994.49,4319.56 h37.5 r90; Top Overlay "D1" at 994.49,4465.23 h37.5 r90; Assembly Bottom "D1" at 979.49,4523.22 h25 r90; Assembly Bottom "A1" at 979.49,4375.58 h25 r90
XP3: Bottom Overlay "A1" at 994.49,1955.58 h37.5 r90; Bottom Overlay "D1" at 994.49,2103.22 h37.5 r90; Top Overlay "D1" at 994.49,2040.23 h37.5 r90; Top Overlay "A1" at 994.49,1894.56 h37.5 r90; Assembly Bottom "A1" at 979.49,1950.58 h25 r90; Assembly Bottom "D1" at 979.49,2098.22 h25 r90
XP4: Bottom Overlay "D1" at 3453.22,4305.52 h37.5; Bottom Overlay "A1" at 3305.58,4305.52 h37.5; Top Overlay "A1" at 3244.55,4305.52 h37.5; Top Overlay "D1" at 3390.22,4305.52 h37.5; Assembly Bottom "D1" at 3448.22,4320.52 h25; Assembly Bottom "A1" at 3300.58,4320.52 h25